# Altium PCB bbi-simple-rev1.PcbDoc
Units mil, origin at the board's own origin, x right, y up, seen from the top; angles counter-clockwise.
Board outline 1889.76 x 866.14 mil, 2 copper layers (Top Layer, Bottom Layer); 18 components, 9 nets, 75 pads, 11 vias.
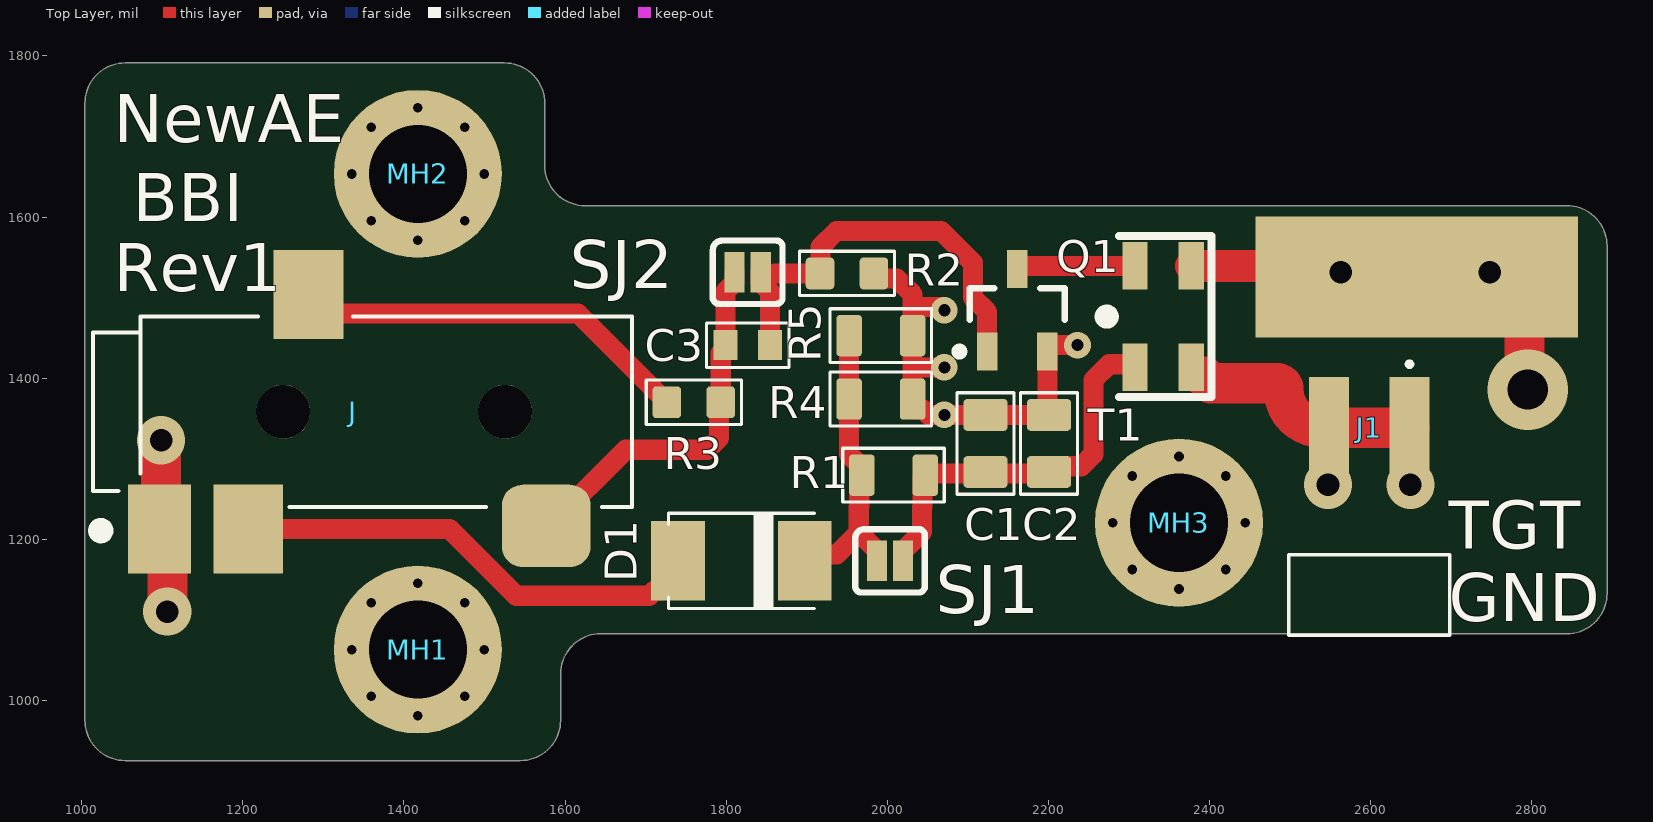
[diagram p0: Top Layer view]
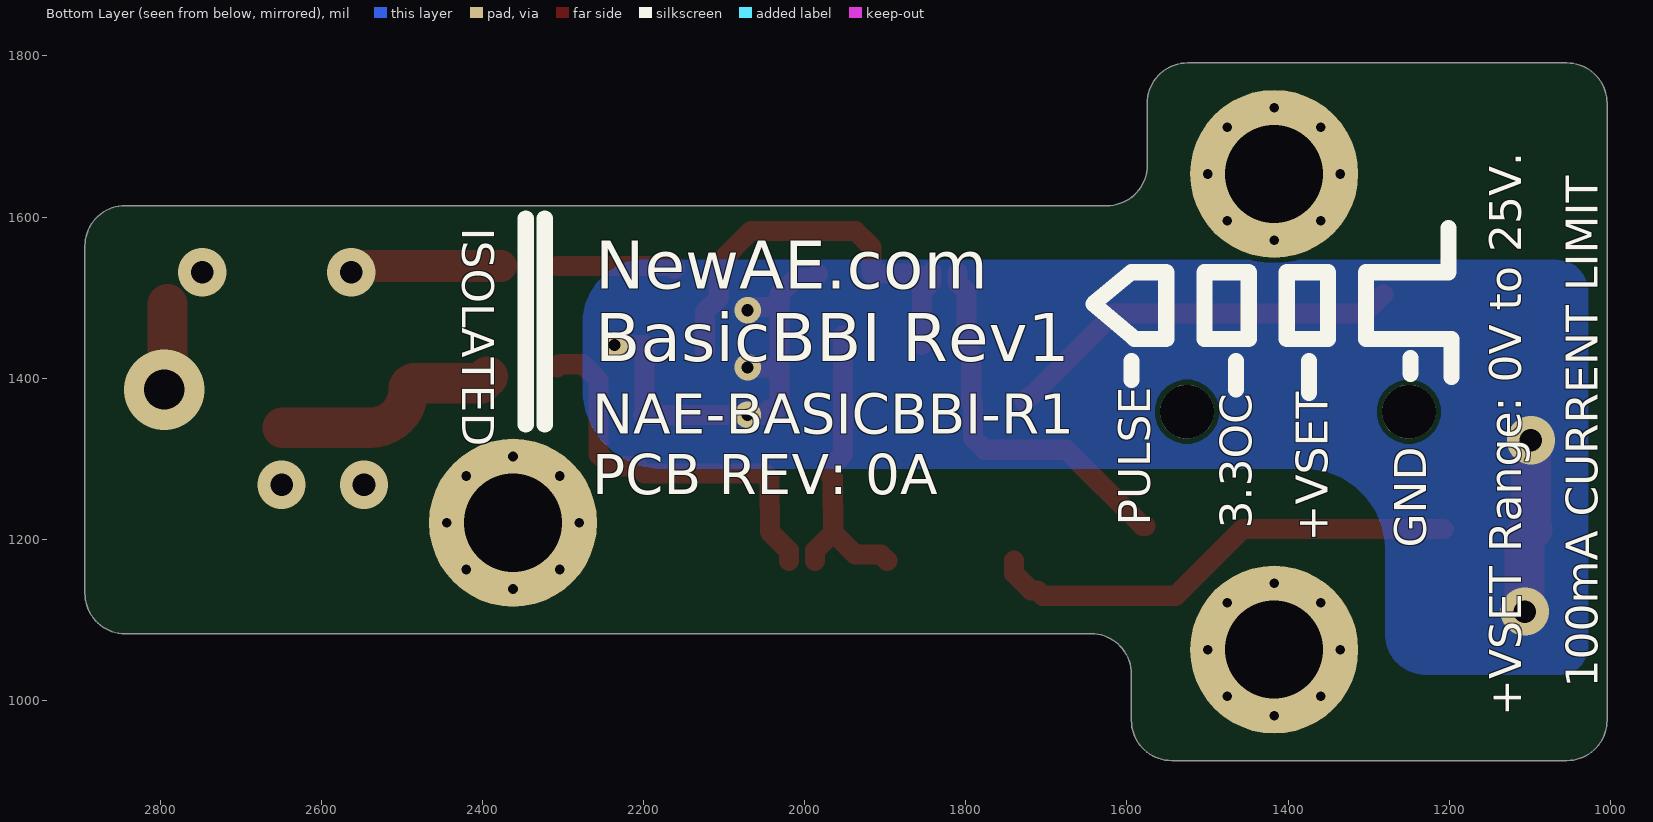
[diagram p1: Bottom Layer view, seen from below]
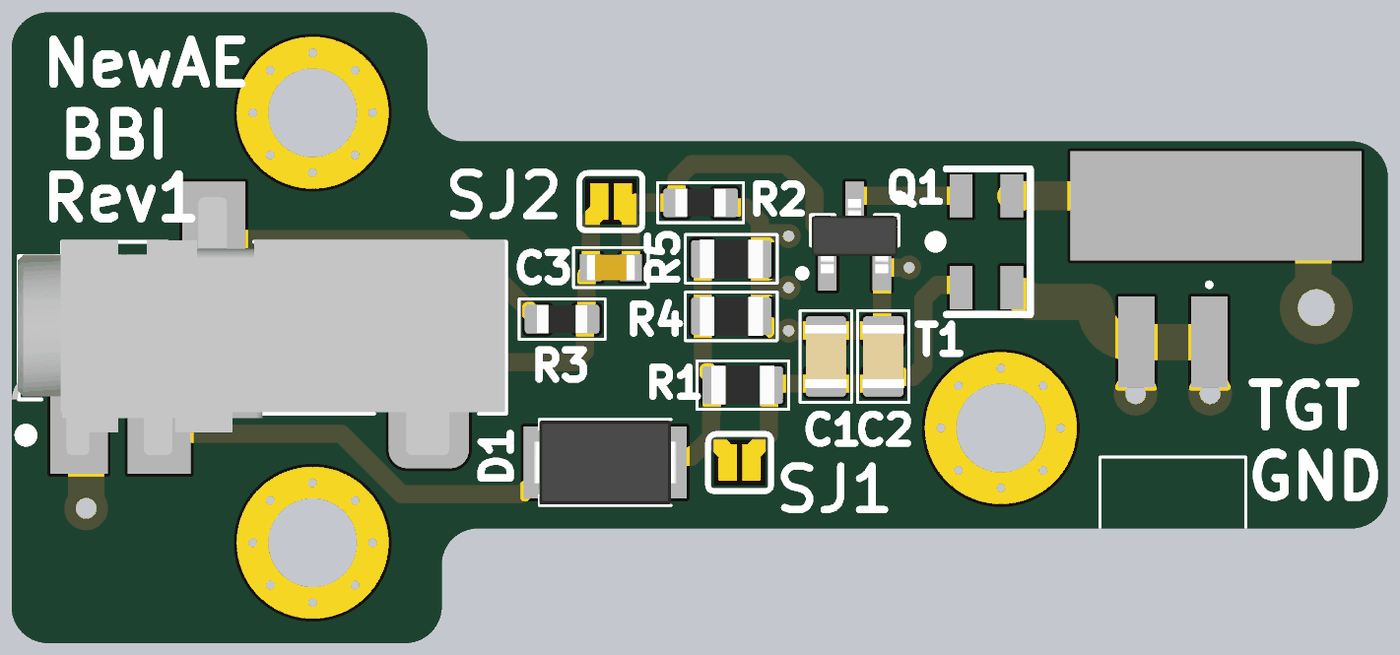
[diagram p2: 3D render of the assembled board from above, using the file's embedded part models]

## Layer stack, top to bottom
Top Solder: solder mask 0.4, Solder Resist, Dk 3.5
Top Layer: signal copper 1.4
Dielectric 1: dielectric 12.6, FR-4, Dk 4.8
Bottom Layer: signal copper 1.4
Bottom Solder: solder mask 0.4, Solder Resist, Dk 3.5

## Board outline
1003.94,975.2 ccw(c1053.94,975.2) 1053.94,925.2 1544.49,925.2 ccw(c1544.49,975.2) 1594.49,975.2 1594.49,1032.68 cw(c1644.49,1032.68) 1644.49,1082.68 2843.7,1082.68 ccw(c2843.7,1132.68) 2893.7,1132.68 2893.7,1564.17 ccw(c2843.7,1564.17) 2843.7,1614.17 1624.8,1614.17 cw(c1624.8,1664.17) 1574.8,1664.17 1574.8,1741.34 ccw(c1524.8,1741.34) 1524.8,1791.34 1053.94,1791.34 ccw(c1053.94,1741.34) 1003.94,1741.34

## Design rules (kind name [scope] priority, off if disabled: settings)
Clearance [All] p1: gap=6 ignorepadtopadclearanceinfootprint=FALSE except(0: Arc-Hole Track-Hole SMDPad-Hole THPad-Hole Via-Hole Fill-Hole Poly-Hole Region-Hole Text-Hole)
PolygonConnect [All] p1: connectstyle=Direct reliefconductorwidth=10 reliefentries=4 polygonreliefangle="90 Angle" airgapwidth=10
RoutingVias [All] p1: holewidth=28 width=50 viastyle="Through Hole" minholewidth=12 minwidth=24 maxholewidth=28 maxwidth=60
SolderMaskExpansion [All] p1: expansion=4 istentingtop=FALSE
Width [All] p1: maxlimit=50 minlimit=10 preferedwidth=10 minimp=50.000000 maximp=50.000000 favimp=50.000000
30 further rules are at their usual default settings.

## Components (designator, comment, footprint, x,y, rotation, side; value= is the part's Value field where it differs from the comment)
C1 "4.7uF/50V" CAPC0805_M 2122.05,1318.9 r90 top value=4.7uF
C2 "4.7uF/50V" CAPC0805_M 2200.79,1318.9 r90 top value=4.7uF
C3 "100n" CAPC0603_M 1826.77,1440.94 r0 top
D1 "B260A" DIOM4326X23N 1818.9,1173.23 r180 top
J "SJ-43514-SMT" CUI_SJ-43514-SMT 1377.95,1358.27 r0 top
J1 "TSM-102-01-L-SH" TSM-102-YY-ZZZ-SH 2598.43,1338.58 r180 top (schematic designator J?)
MH1 "M3, Tight Fit" MOUNT_M3_TIGHT 1417.32,1062.99 r0 top
MH2 "M3, Tight Fit" MOUNT_M3_TIGHT 1417.32,1653.54 r0 top
MH3 "M3, Tight Fit" MOUNT_M3_TIGHT 2362.2,1220.47 r0 top
Q1 "DMN3200U-7" SOT95P245X110-3M 2161.42,1484.25 r90 top
R1 "75R" RESC2012X70N 2007.87,1279.53 r0 top
R2 "1k" RESC1608X55N 1950,1530 r0 top
R3 "1k" RESC1608X55N 1759.84,1370.08 r0 top
R4 "10K/0805" RESC2012X70N 1992.13,1374.02 r0 top value=75R
R5 "10K/0805" RESC2012X70N 1992.13,1452.76 r0 top value=75R
SJ1 "NO" SJ_2S_NO 2003.47,1173.23 r0 top
SJ2 "NO" SJ_2S_NO 1826.77,1531.5 r0 top
T1 "ATB322524" ATB322524_CHUNKY 2342.52,1476.38 r270 top

## Footprints (in the part's own frame and the unit in brackets; to place one, negate y for a bottom-side part, rotate by r counter-clockwise, add the part's x,y. Pads: shape width x height; smd on the part's side, far side on the other; paste and mask are expansions set on the pad)
ATB322524_CHUNKY [mm]
  rect 1.5x0.8 smd: 1(-1.6,-0.885) 2(-1.6,0.885) 3(1.6,0.885) 4(1.6,-0.885)
  silkscreen extent -2.54,-1.96 2.54,1.52, body extent -1.6,-1.25 1.6,1.25, height 2.4
CAPC0603_M [mm]
  rect 0.75x0.95 smd: 1(-0.7,0) 2(0.7,0)
  silkscreen extent -1.3,-0.7 1.3,0.7, body extent -0.85,-0.45 0.85,0.45, height 0.9
CAPC0805_M [mm] "Chip Capacitor, Body 2.0x1.2mm, EIA 0805, IPC Medium Density"
  round 0.254 on Mech15: 0(0,0)
  rrect25% 1x1.4 smd: 1(-0.9,0) 2(0.9,0)
  Top Layer pour cut-out: -0.675,0.7 0.675,0.7 0.675,-0.7 -0.675,-0.7
  silkscreen extent -1.6,-0.9 1.6,0.9, body extent -1.1,-0.72 1.1,0.73, height 1.34
CUI_SJ-43514-SMT [mm]
  rect 2x2.8 smd: 1(-7.15,-3.7)
  rrect50% 2.8x2.6 smd: 2(5.05,-3.6)
  rect 2.2x2.8 smd: 3(-2.45,3.7) 4(-4.35,-3.7)
  round 1.7 hole 1.7 unplated: ""(-3.25,0) ""(3.75,0)
  silkscreen extent -9.25,-3.95 7.75,3, body extent -9.49,-4.44 7.71,4.56, height 5.11
DIOM4326X23N [mm] "Molded Diode, 2-Leads, Body 4.30x2.60mm, IPC Medium Density"
  rect 1.7x2.5 smd: A(2,0) K(-2,0)
  silkscreen extent -2.3,-1.5 2.3,1.5, body extent -2.52,-1.46 2.52,1.46, height 2.3
MOUNT_M3_TIGHT [mil]
  round 14 hole 12: 1(-82.21,0) 1(-58.13,-58.13) 1(-58.13,58.13) 1(0,-82.21) 1(0,82.21) 1(0,82.21) 1(58.13,-58.13) 1(58.13,58.13) 1(82.21,0)
  round 208.66 hole 122.05: 1(0,0)
RESC1608X55N [mm] "Chip Resistor, Body 1.6x0.8mm, EIA 0603, IPC Medium Density"
  round 0.254 on Mech15: 0(0,0)
  rrect25% 0.9x1 smd: 1(-0.85,0) 2(0.85,0)
  Top Layer pour cut-out: -0.6,0.5 0.6,0.5 0.6,-0.5 -0.6,-0.5
  silkscreen extent -1.5,-0.7 1.5,0.7, body extent -0.87,-0.47 0.88,0.48, height 0.54
RESC2012X70N [mm] "Chip Resistor, Body 2.0x1.2mm, EIA 0805, IPC Medium Density"
  round 0.254 on Mech15: 0(0,0)
  rrect25% 0.8x1.3 smd: 1(-1,0) 2(1,0)
  Top Layer pour cut-out: -0.725,0.65 -0.525,0.85 0.525,0.85 0.725,0.65 0.725,-0.65 0.525,-0.85 -0.525,-0.85 -0.725,-0.65
  silkscreen extent -1.6,-0.85 1.6,0.85, body extent -1.1,-0.67 1.1,0.68, height 0.69
SJ_2S_NO [mil] "Solder Jumper, open (no paste)"
  rect 25x50 smd paste-393.7: 1(-16.22,0) 2(16.22,0)
  silkscreen extent -43,-39 43,39
SOT95P245X110-3M [mm] "SOT23, 3-Leads, Body 2.90x2.45mm, Pitch 0.95mm, IPC Low Density"
  rect 1.2x0.65 smd: 1(-1.3,0.95) 2(-1.3,-0.95) 3(1.3,0)
  silkscreen extent -1.42,-1.5 0.7,1.95, body extent -1.3,-1.5 1.3,1.5, height 1.1
TSM-102-YY-ZZZ-SH [mm]
  rect 1.27x3.18 smd: 1(-1.27,0) 2(1.27,0)
  silkscreen extent -2.54,-2.05 2.54,6.55

## Part data
C1 C2: library part CCHIP-4u7-0805-50V, "4u7, 50V, 0805, Ceramic", Case-EIA=0805, Case-Metric=1608, Manufacture 1="TDK Corporation", Manufacture Part Number 1=C2012X5R1H475K125AB, Rated Voltage=50VDC, Supplier Part Number 1=445-5980-1-ND, Temperature Range="-55C to 85C", Tolerance=10%, Component Group=Capacitor, Component Type=Standard, Mounting Technology=SMT, Part Number=CCHIP-4u7-0805-50V, Pin Count=2, RoHS=Yes, Supplier 1=Digi-Key
C3: library part CCHIP-100n-0603, "100n, 0603", Case-EIA=0603, Case-Metric=1608, Manufacture 1=Kemet, Manufacture Part Number 1=C0603C104K5RACTU, Rated Voltage=50VDC, Supplier Part Number 1=399-5089-2-ND, Component Group=Capacitor, Component Type=Standard, Mounting Technology=SMT, Part Number=CCHIP-100n-0603, Pin Count=2, Supplier 1=Digi-Key
D1: library part DIODE_SCHOTTKY_2A, "DIODE SCHOTTKY 60V 2A SMA", Manufacture 1="Diodes Incorporated", Manufacture Part Number 1=B260A-13-F, Supplier Part Number 1=B260A-FDICT-ND, Component Group=Diode, Component Type=Standard, Mounting Technology=SMT, Part Number=DIODE_SCHOTTKY_2A, Pin Count=2, PP Material Stack=0, PP Rotation=0, RoHS=Yes, Supplier 1=Digi-Key
J: "4 conductor TRS, 3.5mm", Manufacture 1="CUI Devices", Manufacture Part Number 1=SJ-43514-SMT-TR, Package=None, Supplier Part Number 1=CP-43514SJCT-ND, Availability=Unavailable, Component Group=Connector, Component Type=Standard, MF="CUI Devices", MP=SJ-43514-SMT, Part Number=SJ-43514-SMT, Pin Count=4, PP Material Stack=0, PP Rotation=0, PP Rotation1=0, Price=None, SnapEDA_Link=https://www.snapeda.com/parts/SJ-43514-SMT/CUI%20Devices/view-part/511208/?ref=snap, Supplier 1=Digi-Key
J1: "Connector", Manufacturer_Name=SAMTEC, Mouser Part Number=200-TSM10201LSH, Arrow Part Number=TSM-102-01-L-SH, Arrow Price/Stock=https://www.arrow.com/en/products/tsm-102-01-l-sh/samtec, Datasheet Link=http://suddendocs.samtec.com/prints/tsm-1xx-xx-xxx-xx-x-xxx-x-mkt.pdf, Manufacturer_Part_Number=TSM-102-01-L-SH, Mouser Price/Stock=https://www.mouser.co.uk/ProductDetail/Samtec/TSM-102-01-L-SH?qs=0lQeLiL1qyaA4kL5bMFTfA%3D%3D
MH1 MH2 MH3: library part MOUNT_M3_TIGHT, "Machine screw M3 Mounting Hole", Component Group=Mechanical, Component Type=Mechanical, Part Number=MOUNT_M3_TIGHT, Pin Count=1, PP Material Stack=0, PP Rotation=0
Q1: "MOSFET N-CH 30V 2.2A SOT23-3", Manufacture 1="Diodes Inc.", Rated Power=3A, Rated Voltage=30V, Supplier Part Number 1=DMN3200U-7DICT-ND, Component Group=MOSFET, Component Type=Standard, Manufacture Part Number 1=DMN3200U-7, Mounting Technology=SMT, Part Number=DMN3200U-7, Pin Count=3, PP Material Stack=0, PP Rotation=0, RoHS=Yes, Supplier 1=Digi-Key
R1 R4 R5: library part RCHIP-75R-0805, "75R res, 0805, 1%, 1/8W", Case-EIA=0805, Manufacture 1=Yageo, Manufacture Part Number 1=RC0805FR-0775RL, Rated Power=0.125W, Rated Voltage=75VDC, Supplier Part Number 1=311-75.0CRCT-ND, Temperature Range="-55C to 155C", Tolerance=1%, Component Group=Resistor, Component Type=Standard, Mounting Technology=SMT, Part Number=RCHIP-75R-0805, Pin Count=2, Supplier 1=Digi-Key
R2 R3: library part RCHIP-1K-0603, "1k res, 0603, 1%, 1/10W", Case-EIA=0603, Case-Metric=1608, Manufacture 1=Yageo, Manufacture Part Number 1=RC0603FR-071KL, Rated Power=0.1W, Rated Voltage=75VDC, Supplier Part Number 1=311-1.00KHRCT-ND, Temperature Range="-55C to 155C", Tolerance=1%, Component Group=Resistor, Component Type=Standard, Mounting Technology=SMT, Part Number=RCHIP-1K-0603, Pin Count=2, Supplier 1=Digi-Key
SJ1 SJ2: library part SJ_2S_NO, "Solder Jumper, NO", Component Group="PCB Feature", Component Type="Standard (No BOM)", Mounting Technology=COPPER, Part Number=SJ_2S_NO, Pin Count=2
T1: library part ATB322524_PROTO, "HV Transformer 1:10, Small", Manufacture 1=TDK, Component Group=Inductor, Component Type=Standard, Manufacture Part Number 1=ATB322524, Mounting Technology=SMT, Part Number=ATB322524_PROTO, Pin Count=4, RoHS=Yes, Supplier 1=Mouser

## Free pads (board coordinates)
  rect 400x150 smd: 5(2657.48,1525.75)

## Via types
v1: diameter 60, hole 28, Top Layer to Bottom Layer, tented bottom, 4 vias
v2: diameter 33, hole 15, Top Layer to Bottom Layer, tented both sides, 4 vias
v3: diameter 60, hole 28, Top Layer to Bottom Layer, tented both sides, 2 vias
v4: diameter 100, hole 50, Top Layer to Bottom Layer, tented bottom, 1 vias

## Nets (pads, with @x,y where several pads share a name; then routed paths per layer and width w, separated by ;. In a path a pad name is that pad's centre, name@x,y a point inside that pad or via, vN(x,y) a via of type N, cw(c..) or ccw(c..) an arc to the next point about the centre after c; other vN are vias at no path point)
GND: C1.2 C2.2 J.1 Q1.2 R2.2 R4.2 R5.2 | length 787.3
  Top Layer w25: R2.2 1983.46,1528.84 1988.68,1523.62 2011.81,1523.62 2031.5,1503.94 2031.5,1488.19 ; v2(2070.87,1413.39) 2031.5,1413.39 ; v2(2070.87,1484.25) 2066.93,1488.19 2031.5,1488.19 ; v2(2236.22,1440.94) 2199.11,1440.94 2198.82,1440.65 Q1.2 2199.11,1432.78 2199.11,1356 C2.2 2051.18,1354.33 2044.59,1360.93 2034.74,1360.93 2031.5,1364.17 2031.5,1413.39 ; 2031.5,1413.39 R5.2 2031.5,1488.19
  Top Layer w50: v3@1098.43,1314.96 1098.43,1214.57 J.1 1106.3,1202.76 v3(1106.3,1110.24)
  other v2: 2070.87,1354.33
  other v3: 1098.43,1322.83
NetC1_1: C1.1 C2.1 R1.2 SJ1.2 T1.4 | length 491.4
  Top Layer w25: SJ1.2 2019.68,1185.73 2043.31,1209.35 2043.31,1240.16 2044,1240.85 2044,1276.28 R1.2 2049.21,1281.5 2198.82,1281.5 C2.1 2207.97,1290.65 2241.26,1290.65 2255.91,1305.29 2255.91,1397.64 2275.59,1417.32 2304.43,1417.32 2307.68,1414.07 T1.4
NetC3_1: C3.1 J.2 R3.2 SJ2.1 | length 473.6
  Top Layer w25: J.2 1580.71,1216.54 1675.2,1311.02 1776.69,1311.02 1791.34,1325.67 1791.34,1368.11 R3.2 1793.31,1431.1 1799.21,1437.01 C3.1 1799.21,1507.65 1810.56,1519 SJ2.1
NetC3_2: C3.2 Q1.1 R2.1 SJ2.2 | length 515.4
  Top Layer w25: SJ2.2 1842.99,1519 1854.33,1507.65 C3.2 ; 1860.71,1530 R2.1 1917.32,1530.79 1917.32,1562.99 1937.01,1582.68 2066.93,1582.68 2106.3,1543.31 2106.3,1500 2124.02,1482.28 Q1.1
NetD1_A: D1.A J.4 | length 594.9
  Top Layer w25: J.4 1456.69,1212.6 1539.37,1129.92 1704.55,1129.92 1711.14,1136.52 1719.19,1136.52 1740.16,1157.48 D1.A
NetD1_K: D1.K R1.1 R4.1 R5.1 SJ1.1 | length 378.6
  Top Layer w25: D1.K 1905.51,1181.1 1937.26,1181.1 1964.57,1208.41 ; R5.1 R4.1 1952.76,1305.12 1968.5,1289.37 R1.1 1965.26,1276.28 1965.26,1240.85 1964.57,1240.16 1964.57,1208.41 ; SJ1.1 1987.25,1185.73 1964.57,1208.41
NetJ?_1: J1.1 J1.2 T1.3 | length 289.4
  Top Layer w50: 2393.7,1401.57 2401.57,1393.7 2484.25,1393.7 cw(c2484.25,1385.83) 2492.13,1385.83 ccw(c2539.37,1385.83) 2539.37,1338.58 J1.2 J1.1
  other v1: 2547.24,1267.72 2649.61,1267.72
NetJ_3: J.3 R3.1 | length 501.5
  Top Layer w25: J.3 1305.12,1480.32 1616.14,1480.32 1719.19,1377.26 1721.16,1377.26 1726.38,1372.05 R3.1
NetQ1_3: Q1.3 T1.1 | length 150
  Top Layer w25: Q1.3 2161.42,1539.07 2161.71,1539.37 T1.1
pads on no net: C1.0 C2.0 J. MH1.1 MH2.1 MH3.1 R1.0 R2.0 R3.0 R4.0 R5.0 T1.2
copper on no net: | length 284.6
  Top Layer w10: v1@2547.24,1539.37 ccw(c2547.24,1543.31) v1@2551.18,1543.31
  Top Layer w40: 2377.36,1539.37 v1@2547.24,1539.37
  Top Layer w50: 2791.34,1492.13 2791.34,1389.76 ccw(c2795.28,1389.76) v4(2795.28,1385.83)
  other v1: 2562.99,1531.5 2748.03,1531.5

## Polygon pours and split planes (outlines as drawn)
GND on Bottom Layer "GND_L02_P000" (solid, pour order 0): 1019.68,1539.37 cw(c1038.69,1520.36) 1038.69,1547.24 2196.85,1547.24 cw(c2196.85,1468.5) 2275.59,1468.5 2275.59,1387.4 cw(c2175.59,1387.4) 2175.59,1287.4 1379.53,1287.4 ccw(c1379.53,1187.4) 1279.53,1187.4 1279.53,1082.68 cw(c1228.35,1082.68) 1228.35,1031.5 1062.99,1031.5 cw(c1062.99,1066.93) 1027.56,1066.93 1027.56,1507.87 cw(c1066.93,1507.87) 1066.93,1547.24

## Silkscreen, mask and mechanical layers (free items; w line width, h text height)
Top Overlay:
  text "NewAE" at 1039.56,1693.1 h60
  text "BBI" at 1063.18,1594.68 h60
  text "Rev1" at 1039.56,1508.06 h60
  text "TGT / GND" at 2696.85,1098.43 h60
Bottom Overlay:
  lines w20: 1196.85,1401.57 1196.85,1448.82 1303.15,1448.82 1303.15,1531.5 1200.79,1531.5 1200.79,1586.61 ; 1248.03,1405.51 1248.03,1425.2 ; 1374.02,1381.89 1374.02,1421.26 ; 1464.57,1385.83 1464.57,1421.26 ; 1594.49,1397.64 1594.49,1421.26 ; 2322.83,1342.52 2322.83,1598.43 ; 2346.46,1342.52 2346.46,1598.43 ; 1350.39,1448.82 1350.39,1531.5 1401.57,1531.5 1401.57,1448.82 1350.39,1448.82 ; 1448.82,1448.82 1503.94,1448.82 1503.94,1531.5 1448.82,1531.5 1448.82,1448.82 ; 1551.18,1448.82 1590.55,1448.82 1641.73,1492.13 1594.49,1531.5 1551.18,1531.5 1551.18,1448.82
  text "ISOLATED" at 2425.01,1586.43 h40 r90
  text "NewAE.com / BasicBBI Rev1" at 2259.84,1421.26 h60
  text "NAE-BASICBBI-R1 / PCB REV: 0A" at 2263.78,1255.91 h50
  text "PULSE" at 1571.06,1216.72 h40 r270
  text "3.3OC" at 1445.07,1212.79 h40 r270
  text "+VSET" at 1350.58,1197.04 h40 r270
  text "GND" at 1228.54,1189.17 h40 r270
  text "100mA CURRENT LIMIT" at 1015.75,1015.75 h40 r270
  text "+VSET Range: 0V to 25V." at 1110.24,980.32 h40 r270
Mechanical 1:
  lines w10: 1003.94,975.2 ccw(c1053.94,975.2) 1053.94,925.2 1544.49,925.2 ccw(c1544.49,975.2) 1594.49,975.2 1594.49,1032.68 cw(c1644.49,1032.68) 1644.49,1082.68 2843.7,1082.68 ccw(c2843.7,1132.68) 2893.7,1132.68 2893.7,1564.17 ccw(c2843.7,1564.17) 2843.7,1614.17 1624.8,1614.17 cw(c1624.8,1664.17) 1574.8,1664.17 1574.8,1741.34 ccw(c1524.8,1741.34) 1524.8,1791.34 1053.94,1791.34 ccw(c1053.94,1741.34) 1003.94,1741.34 1003.94,1338.58 1003.94,975.2